# Altium PCB PCB2.PcbDoc
Units mm, origin at the board's own origin, x right, y up, seen from the top; angles counter-clockwise.
Board outline 129 x 69.1 mm, 2 copper layers (Top Layer, Bottom Layer); 35 components, 26 nets, 160 pads, 13 vias.
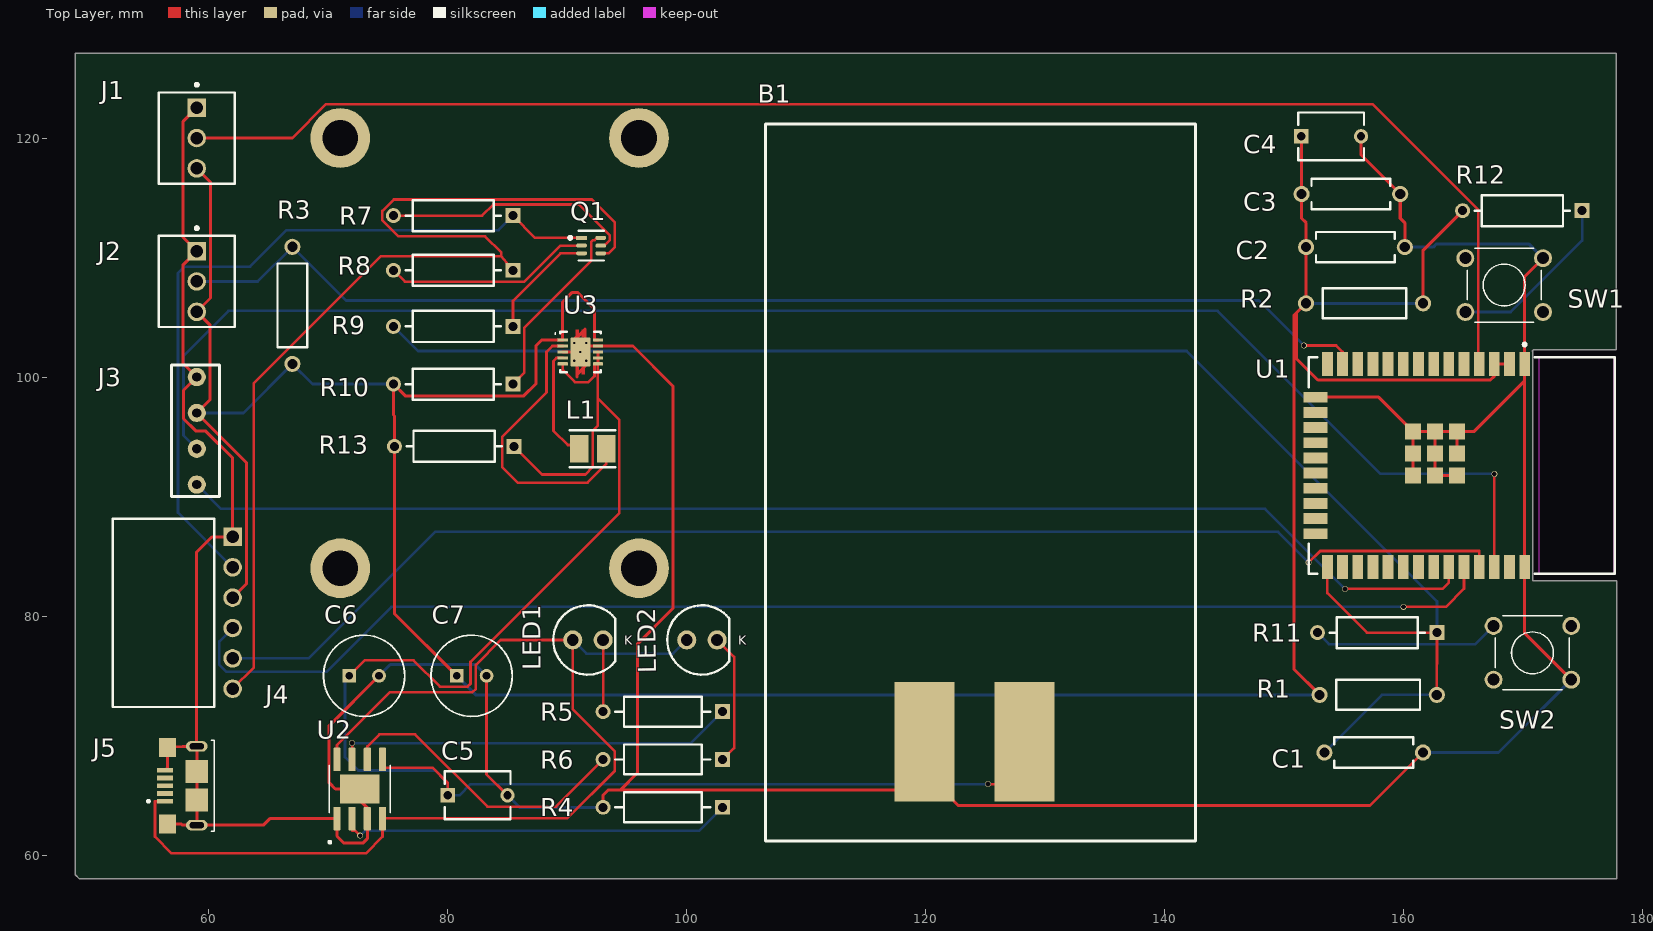
[diagram p0: Top Layer view]
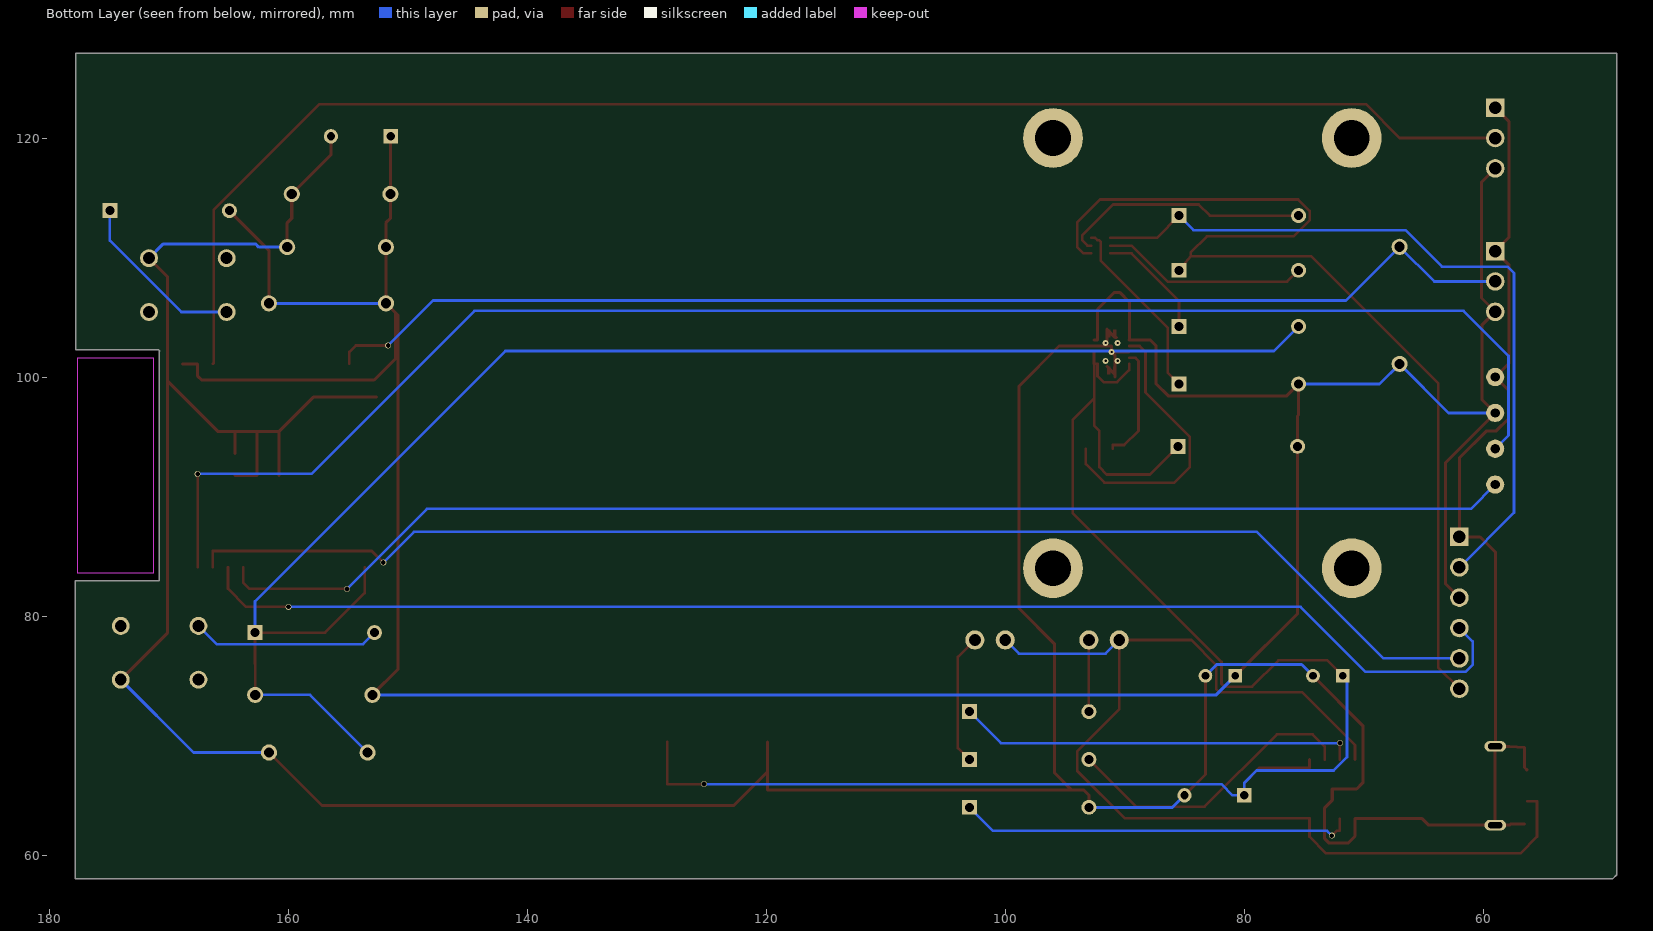
[diagram p1: Bottom Layer view, seen from below]
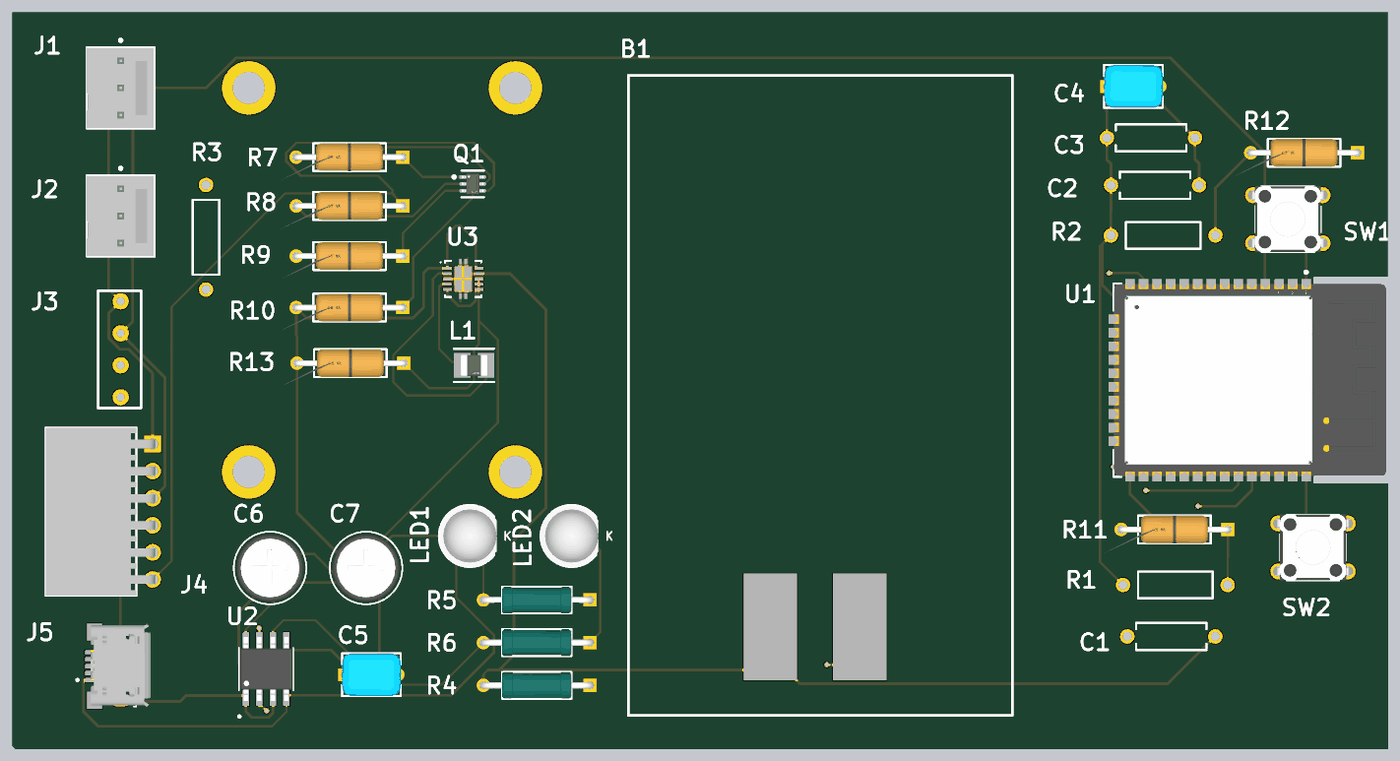
[diagram p2: 3D render of the assembled board from above, using the file's embedded part models]

## Layer stack, top to bottom
Top Solder: solder mask 0.0102, Solder Resist, Dk 3.5
Top Layer: signal copper 0.0356
Dielectric 1: dielectric 0.32, FR-4, Dk 4.8
Bottom Layer: signal copper 0.0356
Bottom Solder: solder mask 0.0102, Solder Resist, Dk 3.5

## Board outline
177.775,127.1 177.775,102.3 170.875,102.3 170.75,102.175 170.8,102.125 170.8,82.95 177.825,82.95 177.825,58 49.175,58 48.825,58.35 48.825,127.1

## Design rules (kind name [scope] priority, off if disabled: settings)
Clearance [All] p1: gap=0.2 ignorepadtopadclearanceinfootprint=TRUE
HoleSize [All] p1: absolutevalues=TRUE maxlimit=3.5 minlimit=0.025 maxpercent=80.000 minpercent=20.000
MinimumSolderMaskSliver [All] p1: minsoldermaskwidth=0.045
PolygonConnect [All] p1: connectstyle=Relief reliefconductorwidth=0.254 reliefentries=4 polygonreliefangle="90 Angle" airgapwidth=0.254
RoutingVias [All] p1: holewidth=0.4 width=0.5 viastyle="Through Hole" minholewidth=0.4 minwidth=0.5 maxholewidth=0.4 maxwidth=0.5
SilkToSilkClearance [All] p1: silktosilkclearance=0.35
SilkToSolderMaskClearance [IsPad] p1: minsilkscreentomaskgap=0.1 clearancetoexposedcopper=TRUE
SolderMaskExpansion [All] p1: expansion=0.102 istentingtop=FALSE
Width WidthPOW [(InNet('3V3') OR InNet('GND'))] p1: maxlimit=0.254 minlimit=0.254 preferedwidth=0.254
Width [All] p2: maxlimit=0.22 minlimit=0.204 preferedwidth=0.22
26 further rules are at their usual default settings.

## Components (designator, comment, footprint, x,y, rotation, side; value= is the part's Value field where it differs from the comment)
B1 "3.7V LiPO battery" Battery_lipo 124.079,69.469 r180 top
C1 "MD015E104MAB" AVX-MD01 157.48,68.58 r180 top
C2 "MD015E104MAB" AVX-MD01 155.956,110.871 r180 top
C3 "MD015E104MAB" AVX-MD01 155.575,115.316 r180 top
C4 "RCER71E226MWM1H03A" FP-RCEWM1-MFG 153.924,120.142 r0 top
C5 "RCER71H106MWK1H03B" FP-RCEWM1-MFG 82.5,65 r0 top
C6 "ECEA1VKN100" FP-RAD-TH-D_6_3_0_5-L_7_1-MFG 73,75 r0 top
C7 "ECEA1VKN100" FP-RAD-TH-D_6_3_0_5-L_7_1-MFG 82,75 r0 top
J1 "TDS" MOLX-22-23-2031_V 59,120 r270 top
J2 "DS18B20" MOLX-22-23-2031_V 59,108 r270 top
J3 "OLED" "female header" 59,96 r0 top
J4 "FT232RL" SMTC-SSW-106-02-X-S-RA 62,86.62 r270 top
J5 "10118193-0001LF" AMPHENOL_10118193-0001LF 59,65.8 r90 top
L1 "LQM2HPN2R2MJ0L" FP-LQM2HPN_J0-IPC_A 92.126,94 r0 top
LED1 "151051BS04000" "Type 5mm" 91.73,78 r0 top
LED2 "151051BS04000" "Type 5mm" 101.27,78 r0 top
Q1 "UMH3NTN" FP-UMT6-IPC_C 92,111 r0 top
R1 "OD103JE" OMTE-RES7X2.5-2 157.861,73.406 r180 top
R2 "OD103JE" OMTE-RES7X2.5-2 156.718,106.172 r180 top
R3 "OD103JE" OMTE-RES7X2.5-2 67,106 r90 top
R4 "MRS25000C9530FCT00" FP-MRS25-MFG 98,64 r180 top
R5 "MRS25000C9530FCT00" FP-MRS25-MFG 98,72 r180 top
R6 "MRS25000C9530FCT00" FP-MRS25-MFG 98,68 r180 top
R7 "ZOR-25-R-52-0R" FP-ZOR-25-R-52-0R-MFG 80.455,113.507 r180 top
R8 "ZOR-25-R-52-0R" FP-ZOR-25-R-52-0R-MFG 80.455,108.935 r180 top
R9 "ZOR-25-R-52-0R" FP-ZOR-25-R-52-0R-MFG 80.455,104.236 r180 top
R10 "ZOR-25-R-52-0R" FP-ZOR-25-R-52-0R-MFG 80.455,99.41 r180 top
R11 "ZOR-25-R-52-0R" FP-ZOR-25-R-52-0R-MFG 157.781,78.613 r180 top
R12 "ZOR-25-R-52-0R" FP-ZOR-25-R-52-0R-MFG 169.926,113.919 r180 top
R13 "ZOR-25-R-52-0R" FP-ZOR-25-R-52-0R-MFG 80.535,94.203 r180 top
SW1 "430156050726" 430156050726 168.402,107.696 r0 top
SW2 "430156050726" 430156050726 170.763,76.926 r0 top
U1 "ESP32-WROOM-32D (4MB)" FP-ESP32-WROOM-32D_4MB-MFG 164.857,92.599 r270 top
U2 "TP4056" SOP127P600X175-9N 72.635,65.525 r90 top
U3 "TPS63000DRCR" DRC0010J_V 91.1,102.1 r0 top

## Footprints (in the part's own frame and the unit in brackets; to place one, negate y for a bottom-side part, rotate by r counter-clockwise, add the part's x,y. Pads: shape width x height; smd on the part's side, far side on the other; paste and mask are expansions set on the pad)
430156050726 [mm] "6*6mm vertical type, THT, height 5.0mm, white actuator, 260gf, Bulk"
  round 1.5 hole 1: 1(-3.25,2.25) 2(-3.25,-2.25) 3(3.25,2.25) 4(3.25,-2.25)
  silkscreen extent -3.1,-3.1 3.1,3.1, body extent -3.95,-3.1 3.95,3.1, height 5.01
AMPHENOL_10118193-0001LF [mm]
  rect 0.4x1.35 smd: 1(-1.3,2.675) 2(-0.65,2.675) 3(0,2.675) 4(0.65,2.675) 5(1.3,2.675)
  rect 1.6x1.4 smd: S1(-3.2,2.45) S2(3.2,2.45)
  rect 1.9x1.9 smd: S3(1.2,0) S4(-1.2,0)
  oval 0.9x1.8 hole 0.5 slot 1.2 at 90 deg: S5(-3.3,0) S6(3.3,0)
  silkscreen extent -3.8,-1.45 3.8,4.15, body extent -3.86,-2.83 4,2.83, height 3.18
AVX-MD01 [mm] "THD, 2-Leads, Body 6.6x2.54mm"
  round 1.35 hole 0.85: 1(-4.127,0) 2(4.127,0)
  silkscreen extent -3.3,-1.27 3.3,1.27, body extent -3.3,-1.27 3.3,1.27, height 4.45
Battery_lipo [mm]
  rect 5x10 smd: +(-4.191,0) -(4.191,0)
  silkscreen extent -18.5,-51.7 17.5,8.3, body extent -19.5,-52.7 18.4,9, height 0.25
DRC0010J_V [mm] "SON, 10-Leads, Body 3x3mm, Pitch 0.5mm, Thermal Pad 2.4x1.65mm, TI Recommended"
  rrect36% 0.85x0.28 smd paste-0.025 mask+0.07: 1(-1.475,1) 2(-1.475,0.5) 3(-1.475,0) 4(-1.475,-0.5) 5(-1.475,-1) 6(1.475,-1) 7(1.475,-0.5) 8(1.475,0) 9(1.475,0.5) 10(1.475,1)
  rrect6% 1.65x2.4 smd paste-0.825 mask+0.07: 11(0,0)
  Top Layer region: -0.39,-1.9 -0.11,-1.9 -0.11,-1.2 -0.39,-1.2
  Top Layer region: 0.39,-1.2 0.11,-1.2 0.11,-1.9 0.39,-1.9
  Top Layer region: 0.39,1.9 0.11,1.9 0.11,1.2 0.39,1.2
  Top Layer region: -0.39,1.2 -0.11,1.2 -0.11,1.9 -0.39,1.9
  silkscreen extent -2.15,-1.7 1.7,1.7, body extent -1.55,-1.55 1.55,1.55, height 1
"female header" [mil]
  round 60 hole 30: 1(0,157.48) 2(0,39.37) 3(0,-78.74) 4(0,-196.85)
  silkscreen extent -83,-236 75,197, body extent -118,-236 118,197, height 118
FP-ESP32-WROOM-32D_4MB-MFG [mm]
  rect 2x0.9 smd paste+0 mask+0: 1(-8.5,5.26) 2(-8.5,3.99) 3(-8.5,2.72) 4(-8.5,1.45) 5(-8.5,0.18) 6(-8.5,-1.09) 7(-8.5,-2.36) 8(-8.5,-3.63) 9(-8.5,-4.9) 10(-8.5,-6.17) 11(-8.5,-7.44) 12(-8.5,-8.71) 13(-8.5,-9.98) 14(-8.5,-11.25) 25(8.5,-11.25) 26(8.5,-9.98) 27(8.5,-8.71) 28(8.5,-7.44) 29(8.5,-6.17) 30(8.5,-4.9) 31(8.5,-3.63) 32(8.5,-2.36) 33(8.5,-1.09) 34(8.5,0.18) 35(8.5,1.45) 36(8.5,2.72) 37(8.5,3.99) 38(8.5,5.26)
  rect 0.9x2 smd paste+0 mask+0: 15(-5.715,-12.25) 16(-4.445,-12.25) 17(-3.175,-12.25) 18(-1.905,-12.25) 19(-0.635,-12.25) 20(0.635,-12.25) 21(1.905,-12.25) 22(3.175,-12.25) 23(4.445,-12.25) 24(5.715,-12.25)
  rect 1.33x1.33 smd paste+0 mask+0: 39(-2.835,-0.405) 39(-2.835,-2.24) 39(-2.835,-4.075) 39(-1,-0.405) 39(-1,-2.24) 39(-1,-4.075) 39(0.835,-0.405) 39(0.835,-2.24) 39(0.835,-4.075)
  Keep-Out Layer region: -9,6.45 9,6.45 9,12.75 -9,12.75
  Keep-Out Layer region: -9,6.45 9,6.45 9,12.75 -9,12.75
  silkscreen extent -10.25,-12.8 9.05,12.8, body extent -9.6,-13.35 9.6,12.9, height 0.25
FP-LQM2HPN_J0-IPC_A [mm]
  rect 1.555x2.306 smd paste+0 mask+0: 1(-1.126,0) 2(1.126,0)
  silkscreen extent -1.9,-1.55 1.9,1.55, body extent -2.4,-1.65 2.4,1.65, height 0.25
FP-MRS25-MFG [mm]
  rect 1.25x1.25 hole 0.75 paste-1000 mask+0: 1(-5,0)
  round 1.25 hole 0.75 paste-1000 mask+0: 2(5,0)
  silkscreen extent -3.98,-1.25 3.97,1.25, body extent -5.72,-1.35 5.72,1.35, height 0.25
FP-RAD-TH-D_6_3_0_5-L_7_1-MFG [mm]
  rect 1.15x1.15 hole 0.65 paste-1000 mask+0: 1(-1.25,0)
  round 1.15 hole 0.65 paste-1000 mask+0: 2(1.25,0)
  silkscreen extent -3.4,-3.4 3.4,3.4, body extent -3.5,-3.5 3.5,3.5, height 0.25
FP-RCEWM1-MFG [mm]
  rect 1.2x1.2 hole 0.7 paste-1000 mask+0: 1(-2.5,0)
  round 1.2 hole 0.7 paste-1000 mask+0: 2(2.5,0)
  silkscreen extent -2.75,-2 2.75,2, body extent -3.2,-2.1 3.2,2.1, height 0.25
FP-UMT6-IPC_C [mm]
  rect 0.909x0.336 smd paste+0 mask+0: 1(-0.802,0.65)
  rrect100% 0.909x0.336 smd paste+0 mask+0: 2(-0.802,0) 3(-0.802,-0.65) 4(0.802,-0.65) 5(0.802,0) 6(0.802,0.65)
  silkscreen extent -1.88,-1.25 1.05,1.25, body extent -1.36,-1.1 1.36,1.1, height 0.25
FP-ZOR-25-R-52-0R-MFG [mm]
  rect 1.25x1.25 hole 0.75 paste-1000 mask+0: 1(-5,0)
  round 1.25 hole 0.75 paste-1000 mask+0: 2(5,0)
  silkscreen extent -3.98,-1.3 3.97,1.3, body extent -5.72,-1.4 5.72,1.4, height 0.25
MOLX-22-23-2031_V [mm] "CONN, 3-Leads, Body 7.62x6.35mm, Pitch 2.54mm"
  rect 1.55x1.55 hole 1.05: 1(-2.54,0)
  round 1.55 hole 1.05: 2(0,0) 3(2.54,0)
  silkscreen extent -4.58,-3.18 3.81,3.17, body extent -3.73,-3.25 3.73,3.1, height 10.67
OMTE-RES7X2.5-2 [mm] "Resistor, Axial; Body 7x2.5mm, Lead Dia. 0.6mm"
  round 1.35 hole 0.85: 1(-4.9,0) 2(4.9,0)
  silkscreen extent -3.5,-1.25 3.5,1.25, body extent -3.5,-1.25 3.5,1.25, height 2.5
SMTC-SSW-106-02-X-S-RA [mm] "SQ Post Socket, 1x6 Pins, Right Angle, 2.54mm Pitch, Female"
  rect 1.55x1.55 hole 1.04: 1(0,0)
  round 1.55 hole 1.04: 2(2.54,0) 3(5.08,0) 4(7.62,0) 5(10.16,0) 6(12.7,0)
  silkscreen extent -1.53,-10.03 14.23,-1.52, body extent -1.52,-10.03 14.22,0.2, height 2.41
SOP127P600X175-9N [mm]
  rrect25% 1.97x0.6 smd: 1(-2.475,1.905) 2(-2.475,0.635) 3(-2.475,-0.635) 4(-2.475,-1.905) 5(2.475,-1.905) 6(2.475,-0.635) 7(2.475,0.635) 8(2.475,1.905)
  rect 2.413x3.302 smd paste-3: 9(0,0)
  silkscreen extent -4.54,-2.55 2,2.6, body extent -3,-2.45 3,2.45, height 1.75
"Type 5mm" [mm] "THT, LED-5mm, 2pin- Body 5.8mm"
  round 1.6 hole 1: 1(1.27,0) 2(-1.27,0)
  silkscreen extent -2.9,-2.9 2.29,2.9, body extent -2.9,-2.9 2.5,2.9, height 11.7

## Part data
B1: library part Battery
C1 C2 C3: library part CMP-2000-06690-1, "Ceramic Capacitor, 0.1 uF, +/- 20%, 50 V, -55 to 125 degC, 2-Pin THD (MD01), Bulk", Capacitance=100nF, Case Size/Dimension=6.6x3.43x2.54mm, Dielectric=Z5U, Manufacturer=AVX, Package Description="2-Pin Through Hole Device, Body 6.6 x 2.54 mm", Package Reference=AVX-MD01, Rated Voltage=50V, Tolerance (%)=±20%, Datasheet URL=http://datasheets.avx.com/dipguard.pdf, Datasheet Version=08/2015, Manufacturer URL=http://www.avx.com/, Mounting Technology=ThroughHole
C4: library part CMP-06035-003622-1, "CAP CER 22UF 25V X7R RADIAL", Capacitance=22uF, Case/Package=Radial, Dielectric=X7R, Max Operating Temperature=125°C, Min Operating Temperature=-55°C, Package Quantity=1500, Ratings=AEC-Q200, Resistor Type=Ceramic, Tolerance=20%, Voltage Rating=25V, Height=7.5mm, Height - Seated (Max)=0.295inch, Lead Diameter=0.5mm, Lead Pitch=0.197inch, Lead/Base Style="Formed Leads", Length=0.217inch, Mount="Through Hole", Packaging="Tape and Reel", Termination=Radial, Voltage Rating (DC)=25V, Width=0.157inch
C5: library part CMP-06035-035073-1, "Cap Ceramic 10uF 50V X7R ±20% Radial 5mm +125°C Automotive Ammo Pack", Capacitance=10uF, Case/Package=Radial, Dielectric=X7R, Max Operating Temperature=125°C, Min Operating Temperature=-55°C, Package Quantity=500, Ratings=AEC-Q200, Resistor Type=Ceramic, Tolerance=20%, Voltage=50V, Depth=7.5mm, Diameter=5.5mm, Height=7.5mm, Height - Seated (Max)=0.295inch, Lead Diameter=0.5mm, Lead Free="Lead Free", Lead Pitch=0.197inch, Lead/Base Style="Formed Leads", Length=5.5mm, Mount="Through Hole", Packaging=Bulk, Termination=Radial, Voltage Rating=50V, Voltage Rating (DC)=50V, Width=4mm
C6 C7: library part CMP-05427-001924-1, "Aluminum Electrolytic Capacitors (Radial Lead Type) 10uF ±20% 35V", Capacitance=10uF, Case/Package=Radial, Max Operating Temperature=85°C, Min Operating Temperature=-40°C, Ripple Current=30mA, Tolerance=20%, Construction=RADIAL, Diameter=6.3mm, Height=7mm, Lead Diameter=0.45mm, Lead Pitch=2.5mm, Life (Hours)=1000Hour, Mount="Through Hole", Packaging=Bulk, Radiation Hardening=No, RoHS Compliant=Yes, Termination=Radial
J1 J2: library part CMP-2000-05242-1, "Male Header, Pitch 2.54 mm, 1 x 3 Position, Height 8.18 mm, Tail Length 3.56 mm, RoHS, Bulk", Current Rating=4A, Manufacturer=Molex, Voltage Rating=250V, Brand=Molex, Contact Gender=Pin(Male), Contact Material=Brass, Contact Plating=Tin, Datasheet URL=https://datasheet.ciiva.com/19472/232274-19472863.pdf, Datasheet Version=Sep-01, Factory Pack Quantity=16000, Housing Material=Nylon, Manufacturer URL=http://www.molex.com/, Mounting Angle=Vertical, Mounting Style=ThroughHole, Number of Positions=3Position, Number of Rows=1Row, Packaging=Bulk, Pitch=2.54mm, Product=Headers, Product Category=Headers&WireHousings, RoHS=Details, Series=6373, Termination Style=ThroughHole, Tradename=KK, Type=Locking
J3: library part "4 PIN FEMALE HEADER"
J4: library part CMP-1023-00363-1, "SSW-106-02-G-S-RA, SQ Post Socket, Through-hole, Right Angle, -55 to 125 degC, 2.54mm Pitch, 6-Pin, Female, RoHS", Manufacturer=Samtec, PartNumber=SSW-106-02-G-S-RA, Temperature Range="-55 to 125 degC", ComponentLink1Description="Manufacturer URL", ComponentLink1URL=http://www.samtec.com, ComponentLink2Description=Datasheet, ComponentLink2URL=http://www.samtec.com/documents/webfiles/pdf/SSW_TH.PDF, ComponentLink3Description="Package Specification", ComponentLink3URL=http://www.samtec.com/documents/webfiles/cpdf/SSW-1XX-XX-XXX-X-XX-XXX-XX-MKT.pdf, DatasheetVersion=F-214, Mounting Technology=Through-hole, Orientation="Right Angle", PackageDescription="Assembly, Socket Strip .016 X .031 Tail", PackageReference=SSW-106-02-X-S-RA, PackageVersion="CA, 6/1987", Pitch="2.54 mm", RoHS=True
L1: library part CMP-06042-016476-1, "Multilayer Type Inductor for Power Lines, 1008 (2520), 2.2μH, 20%, 0.15Ω, 1000mA", Case Code (Imperial)=1008, Case Code (Metric)=2520, Current=140mA, Current Rating=1A, DC Resistance (DCR)=120mR, Inductance=2.2uH, Inductance Tolerance=20%, Max Operating Temperature=125°C, Min Operating Temperature=-55°C, Package Quantity=1, Self Resonant Frequency=40MHz, Test Frequency=1MHz, Case/Package=1008, Core Material=Ferrite, DC Current=1A, Depth=2.2mm, Height=1.1mm, Lead Free="Lead Free", Length=2.5mm, Max DC Current=1A, Military Standard=Not, Mount="Surface Mount", Packaging="Tape and Reel", Radiation Hardening=No, Rated Current-Max=1A, REACH SVHC="No SVHC", Series=LQM2HP_J0, Shielding=Shielded, Termination=SMD/SMT, Tolerance=20%, Width=2mm
LED1 LED2: library part CMP-1488-00009-1, "THT LED round mono-color color lens, WL-TMRW, Blue", Emitting color=Blue, Manufacturer="Wuerth Elektronik", ComponentLink1Description="Manufacturer URL", ComponentLink1URL=http://www.we-online.com, ComponentLink2Description=Datasheet, ComponentLink2URL=http://katalog.we-online.de/pbs/datasheet/7448042001.pdfhttp://katalog.we-online.de/pbs/datasheet/7448042001.pdfhttp://katalog.we-online.de/pbs/datasheet/7448042001.pdfhttp://katalog.we-online.de/pbs/datasheet/151051BS04000.pdf, PackageReference="Type 5mm", PartNumber=151051BS04000
Q1: library part CMP-08979-000010-1, "TRANS 2NPN PREBIAS 0.15W UMT6", Case/Package=SOT-363, Collector Base Voltage (VCBO)=50V, Collector-emitter Voltage-Max=300mV, Continuous Collector Current=100mA, Emitter Base Voltage (VEBO)=5V, Max Operating Temperature=150°C, Max Power Dissipation=150mW, Min Operating Temperature=-55°C, Package Quantity=1, Transition Frequency=250MHz, Collector Emitter Breakdown Voltage=50V, Collector Emitter Voltage (VCEO)=50V, Current Rating=100mA, Element Configuration=Dual, hFE Min=100, Lead Free="Lead Free", Max Breakdown Voltage=50V, Max Collector Current=100mA, Max Output Current=100mA, Mount="Surface Mount", Number of Pins=6, Operating Supply Voltage=50V, Packaging="Tape and Reel", Polarity=NPN, Power Dissipation=150mW, Radiation Hardening=No, REACH SVHC="No SVHC", RoHS Compliant=Yes, Series=-, Voltage Rating (DC)=50V
R1 R2: library part CMP-2000-06865-1, "Little Demon(R) Carbon Composition Molded OD Series, 250 V, 10 KOhm, +/-5%, -70 to 130 degC, 2-Pin THD, RoHS, Bulk", Manufacturer=Ohmite, Operating Temperature=-, Package / Case=Axial, Package Description="2-Pin THD Resistor, Body 7 x 2.5 mm, Lead Dia. 0.6 mm", Package Reference=RES7X2.5, Power (Watts)=0.25W,1/4W, Power Rating=0.25W, Resistance (Ohms)=10k, Standard Package=100, Tolerance=±5%, Catalog Drawings=OD,OF,OASeries, Category=Resistors, Composition=CarbonComposition, Datasheet URL=http://www.ohmite.com/cat/res_od_of_oa.pdf, Datasheet Version=06/2016, EDA / CAD Models=DownloadfromAcceleratedDesigns, Family=ThroughHoleResistors, Features=PulseWithstanding, Height=-, Manufacturer URL=http://www.ohmite.com/, Mounting Technology=ThroughHole, Number of Terminations=2, Online Catalog=OD,OF,OASeries,LittleDemon®, Packaging=Bulk, PartNumber=OD103JE, RoHS Information="LittleDemon\"E\"SeriesMaterialDeclaration", Series=LittleDemon®OD, Size / Dimension="0.098\"Diax0.276\"L(2.50mmx7.00mm)", Supplier Device Package=Axial, Temperature Coefficient=-
R3: library part CMP-2000-06865-1, "Little Demon(R) Carbon Composition Molded OD Series, 250 V, 10 KOhm, +/-5%, -70 to 130 degC, 2-Pin THD, RoHS, Bulk", Manufacturer=Ohmite, Operating Temperature=-, Package / Case=Axial, Package Description="2-Pin THD Resistor, Body 7 x 2.5 mm, Lead Dia. 0.6 mm", Package Reference=RES7X2.5, Power (Watts)=0.25W,1/4W, Power Rating=0.25W, Resistance (Ohms)=4.7k, Standard Package=100, Tolerance=±5%, Catalog Drawings=OD,OF,OASeries, Category=Resistors, Composition=CarbonComposition, Datasheet URL=http://www.ohmite.com/cat/res_od_of_oa.pdf, Datasheet Version=06/2016, EDA / CAD Models=DownloadfromAcceleratedDesigns, Family=ThroughHoleResistors, Features=PulseWithstanding, Height=-, Manufacturer URL=http://www.ohmite.com/, Mounting Technology=ThroughHole, Number of Terminations=2, Online Catalog=OD,OF,OASeries,LittleDemon®, Packaging=Bulk, PartNumber=OD103JE, RoHS Information="LittleDemon\"E\"SeriesMaterialDeclaration", Series=LittleDemon®OD, Size / Dimension="0.098\"Diax0.276\"L(2.50mmx7.00mm)", Supplier Device Package=Axial, Temperature Coefficient=-
R4: library part CMP-02408-000049-1, "RES 953 OHM 0.6W 1% AXIAL", Case/Package=Axial, Max Operating Temperature=155°C, Max Power Dissipation=600mW, Min Operating Temperature=-55°C, Resistance=1.2k, Resistance Tolerance=1%, Resistor Type="Metal Film", Temperature Coefficient=50ppm/°C, Voltage Rating=350V, Construction=Cylindrical, Contact Plating=Tin, Diameter=2.5mm, Lead Free="Lead Free", Lead Length=26mm, Length=6.5mm, Military Standard=Not, Number of Terminations=2, Packaging="Tape and Reel", Power Rating=600mW, Radiation Hardening=No, RoHS Compliant=Yes, Series=MRS25, Technology="THIN FILM", Termination=Axial, Tolerance=1%, Width=2.5mm
R5 R6: library part CMP-02408-000049-1, "RES 953 OHM 0.6W 1% AXIAL", Case/Package=Axial, Max Operating Temperature=155°C, Max Power Dissipation=600mW, Min Operating Temperature=-55°C, Resistance="680 ohm", Resistance Tolerance=1%, Resistor Type="Metal Film", Temperature Coefficient=50ppm/°C, Voltage Rating=350V, Construction=Cylindrical, Contact Plating=Tin, Diameter=2.5mm, Lead Free="Lead Free", Lead Length=26mm, Length=6.5mm, Military Standard=Not, Number of Terminations=2, Packaging="Tape and Reel", Power Rating=600mW, Radiation Hardening=No, RoHS Compliant=Yes, Series=MRS25, Technology="THIN FILM", Termination=Axial, Tolerance=1%, Width=2.5mm
R7 R8 R9 R10 R11 R12 R13: library part CMP-03413-000010-1, "RES 0 OHM JUMPER 1/4W AXIAL", Case/Package=Axial, Max Operating Temperature=155°C, Max Power Dissipation=250mW, Min Operating Temperature=-55°C, Package Quantity=5000, Resistance=0mR, Resistor Type="Carbon Film", Temperature Coefficient=100ppm/°C, Tolerance=5%, Construction=Cylindrical, Lead Free="Lead Free", Length=0.248inch, Military Standard=Not, Number of Terminations=2, Packaging="Tape and Reel", Power Rating=250mW, RoHS Compliant=Yes, Series=ZOR, Termination=Axial
SW1 SW2: library part CMP-1453-00003-1, "WS-TATV THT Tact Switch 6X6 mm", Manufacturer="Wuerth Elektronik", ComponentLink1Description="Manufacturer URL", ComponentLink1URL=http://www.we-online.com, ComponentLink2Description=Datasheet, ComponentLink2URL=http://katalog.we-online.de/em/datasheet/4301x6.pdf, NoPins=04, PackageReference=430156050726, PartNumber=430156050726
U1: library part CMP-194065-000009-1, "RX TXRX MOD WIFI TRACE ANT SMD"
U3: library part CMP-0345-00001-2, "Buck-Boost Voltage Converter with 1.8 to 5.5 V Input and 1.2 to 5.5 V Output, -40 to 85 degC, 10-Pin SON (DRC), Green (RoHS & no Sb/Br)", Dynamic Voltage Scaling=TRUE, Manufacturer="Texas Instruments", Switching Frequency(Max)(kHz)=1500, ComponentLink1Description=Datasheet, ComponentLink1URL=http://www.ti.com/general/docs/lit/getliterature.tsp?genericPartNumber=TPS63000&fileType=pdf, ComponentLink2Description="Package Specification", ComponentLink2URL=http://www.ti.com/litv/pdf/mpds117k, DatasheetVersion=SLVS520B, Eco-Plan="Green (RoHS & no Sb/Br)", Iout(Max)(A)=1.2, Iq(Typ)(mA)=0.04, Mounting Technology="Surface Mount", PackageDescription="10-Pin Plastic Small Outline No-Lead, 3 x 3 x 1 mm Body, 0.5 mm Pitch, Exposed Pad", PackageReference=DRC0010J, PackageVersion="revL, Sep-2011", PartNumber=TPS63000DRCR, Regulated Outputs(#)=1, SubFamily="Buck-Boost Regulator", Synchronous Rectification=TRUE, Topology=Buck-Boost, Vin(Max)(V)=5.5, Vin(Min)(V)=1.8, Vout(Max)(V)=5.5, Vout(Min)(V)=1.2

## Free pads (board coordinates)
  round 5 hole 3: 16(71,84) 17(96,120) 18(96,84) 19(71,120)

## Via types
v1: diameter 0.5, hole 0.4, Top Layer to Bottom Layer, 8 vias
v2: diameter 0.5, hole 0.2, Top Layer to Bottom Layer, 5 vias

## Nets (pads, with @x,y where several pads share a name; then routed paths per layer and width w, separated by ;. In a path a pad name is that pad's centre, name@x,y a point inside that pad or via, vN(x,y) a via of type N, cw(c..) or ccw(c..) an arc to the next point about the centre after c; other vN are vias at no path point)
3.7V: B1.+ C5.1 C6.1 R13.1 U2.5 U3.5 U3.6 U3.7 U3.8 | length 141.6
  Top Layer w0.22: C6.1 73.052,76.302 77.14,76.302 79.35,74.092 81.661,74.092 81.905,74.336 81.905,76.165 94.361,88.621 94.361,96.393 92.558,98.196 ; U2.5 74.54,67.31 78.73,67.31 80,66.04 C5.1 ; R13.1 87.892,91.846 91.516,91.846 92.126,92.456 92.126,95.504 92.558,95.936 92.558,98.196 ; U3.5 89.637,101.1 89.637,100.584 90.653,99.568 91.77,99.568 92.278,100.076 92.278,101.1 U3.6@92.558,101.1 ; U3.8 U3.7 U3.6 U3.6@92.558,101.1 ; v1(125.197,65.938) 128.27,65.938 B1.+ ; 92.558,98.196 U3.6@92.558,101.1
  Bottom Layer w0.22: C6.1 71.399,74.649 71.399,68.199 72.517,67.081 78.959,67.081 80,66.04 C5.1 80.977,65 81.915,65.938 v1(125.197,65.938)
3V3: C2.2 C3.2 C4.1 C7.1 J1.3 J2.3 J3.2 J4.3 R1.2 R2.1 R2.2 R3.1 R10.2 R12.2 R13.2 U1.2 U1.3 U3.1 U3.10 | length 277
  Top Layer w0.254: J1.3 60.147,116.313 60.147,106.607 J2.3 60.122,104.338 60.122,98.122 J3.2 63.144,92.856 63.144,82.684 J4.3 ; C7.1 75.535,80.215 R13.2 75.535,96.749 75.455,96.829 R10.2 76.44,98.425 86.36,98.425 87.401,99.466 87.401,102.643 87.859,103.1 U3.1@89.611,103.1 ; U3.1 U3.1@89.611,103.1 ; U3.10 92.278,103.1 92.278,105.664 90.856,107.086 90.424,107.086 89.611,106.274 U3.1@89.611,103.1 ; C4.1 151.424,117.727 151.447,117.704 C3.2 151.447,113.284 151.828,112.903 C2.2 151.828,108.519 151.818,108.509 R2.2 151.028,105.382 ; R1.2 150.802,75.565 150.802,105.156 151.028,105.382 ; R2.1 161.618,110.611 R12.2 ; U1.2 U1.3 167.577,100.076 167.247,99.746 152.806,99.746 151.028,101.524 151.028,105.382
  Bottom Layer w0.254: J3.2 62.9,97 R3.1 68.69,99.41 R10.2 ; C7.1 82.344,73.406 R1.2 ; R2.2 R2.1
5V: J5.1 LED1.2 LED2.2 U2.4 U2.8 | length 95.2
  Top Layer w0.22: J5.1 55.499,64.5 55.499,61.544 56.896,60.147 73.152,60.147 74.54,61.535 U2.4 74.54,63.068 89.992,63.068 93.98,67.056 93.98,68.682 90.46,72.202 LED1.2 84.424,78 82.345,75.921 82.345,73.914 82.066,73.635 75.15,73.635 70.73,69.215 U2.8
  Bottom Layer w0.22: LED1.2 91.6,76.86 98.86,76.86 LED2.2
DTR: J4.6 Q1.4 R8.1 | length 89.2
  Top Layer w0.22: J4.6 63.779,75.699 63.779,99.492 74.397,110.109 84.48,110.109 ; R8.1 84.48,110.109 ; Q1.4 93.47,110.35 93.986,110.866 93.986,112.948 92.072,114.862 75.488,114.862 74.52,113.894 74.52,113.12 75.87,111.77 83.131,111.77 84.48,110.42 84.48,110.109
EC: J1.2 U1.4 | length 125
  Top Layer w0.22: J1.2 66.998,120 69.828,122.83 157.366,122.83 166.232,113.964 166.232,101.174 U1.4
GND: B1.- C1.1 C2.1 C3.1 C4.2 C5.2 C6.2 C7.2 J1.1 J2.1 J3.1 J4.1 J5.5 J5.S1 J5.S2 J5.S3 J5.S4 J5.S5 J5.S6 R4.2 SW1.3 SW2.4 U1.1 U1.15 U1.38 U1.39 U2.1 U2.3 U2.9 U3.3 U3.9 U3.11 | length 372.7
  Top Layer w0.254: J5.5 56.55,67.325 J5.S2 57.809,69.1 J5.S6@58.979,69.1 ; J5.S1 57.709,62.6 57.809,62.5 J5.S5 ; J1.1 57.861,121.401 57.861,111.679 J2.1 57.861,109.401 57.861,101.139 J3.1 57.887,98.887 57.887,96.52 58.903,95.504 59.715,95.504 62,93.219 J4.1 60.255,86.62 58.979,85.344 J5.S6@58.979,69.1 ; C6.2 70.079,70.829 70.079,66.04 70.594,65.525 U2.9 72.635,64.592 73.27,63.957 U2.3 73.27,61.37 72.898,60.998 71.311,60.998 70.73,61.579 U2.1 65.117,63.05 64.567,62.5 J5.S5 ; C7.2 83.25,66.75 C5.2 ; U3.3 v2(91.1,102.1) ; U3.11@90.71,103.3 90.79,103.3 91.49,104 U3.11@91.49,102.935 ; 90.834,100.005 90.834,100.244 ; U3.11@91.49,100.9 90.834,100.244 ; R4.2 93,65.024 93.406,65.43 94.43,65.43 ; B1.- B1.-@119.888,66.969 ; U1.15 157.902,98.314 U1.39@160.782,95.434 ; C4.2 156.424,118.594 C3.1 159.702,113.284 160.083,112.903 C2.1 ; U1.39@160.782,91.764 160.782,93.599 U1.39@160.782,95.434 ; C1.1 157.17,64.142 122.715,64.142 B1.-@119.888,66.969 ; U1.39@164.452,91.764 162.617,91.764 162.617,93.599 U1.39@162.617,95.434 ; U1.39@164.452,93.599 U1.39@164.452,95.434 ; SW1.3 170.117,108.411 U1.1 170.117,99.689 ; SW2.4 170.117,78.572 U1.38 170.117,99.689 ; J5.S6@58.979,69.1 J5.S6 J5.S3 J5.S4 J5.S5 ; 90.834,100.244 90.834,101.834 v2(91.1,102.1) ; v2(91.1,102.1) 91.1,102.591 95.504,102.591 98.857,99.238 98.857,80.645 95.86,77.648 95.86,66.86 94.43,65.43 ; 94.43,65.43 119.888,65.43 B1.-@119.888,66.969 ; U1.39@160.782,95.434 U1.39@162.617,95.434 ; U1.39@162.617,95.434 U1.39@164.452,95.434 ; U1.39@164.452,95.434 165.862,95.434 170.117,99.689
  Bottom Layer w0.254: C6.2 75.196,75.946 82.304,75.946 C7.2 ; C5.2 86,64 R4.2 ; C2.1 162.458,110.871 162.738,111.15 170.448,111.15 SW1.3 ; C1.1 167.917,68.58 SW2.4
  other v2: 90.6,101.35 91.6,101.35 90.6,102.85 91.6,102.85
IO0: C1.2 R1.1 R9.2 R11.1 U1.25 | length 128.8
  Top Layer w0.22: U1.25 153.607,81.927 156.921,78.613 R11.1 162.781,76.017 162.761,75.997 R1.1
  Bottom Layer w0.22: R9.2 77.507,102.184 141.834,102.184 162.781,81.237 R11.1 ; C1.2 158.178,73.406 R1.1
NetL1_1: L1.1 U3.4 | length 9.7
  Top Layer w0.22: U3.4 89.103,101.6 88.849,101.346 88.849,95.504 90.043,94.31 91,94.31 L1.1
NetL1_2: L1.2 U3.2 | length 23.9
  Top Layer w0.22: U3.2 88.757,102.6 88.265,102.108 88.265,98.704 84.557,94.996 84.557,92.456 85.852,91.161 91.702,91.161 93.251,92.71 L1.2
NetLED1_1: LED1.1 R5.2 | length 6
  Top Layer w0.22: R5.2 LED1.1
NetLED2_1: LED2.1 R6.1 | length 11
  Top Layer w0.22: LED2.1 103.962,76.578 103.962,68.962 R6.1
NetQ1_2: Q1.2 R8.2 | length 17.4
  Top Layer w0.22: R8.2 76.415,107.975 86.411,107.975 89.435,111 Q1.2
NetQ1_3: Q1.3 R9.1 | length 9.5
  Top Layer w0.22: R9.1 85.455,106.385 89.42,110.35 Q1.3
NetQ1_5: Q1.5 R7.2 | length 20.9
  Top Layer w0.22: R7.2 82.885,113.507 83.82,114.442 90.972,114.442 93.566,111.848 93.566,111.452 93.114,111 Q1.5
NetQ1_6: Q1.6 R10.1 | length 15.6
  Top Layer w0.22: R10.1 86.411,100.366 86.411,104.14 91.999,109.728 91.999,111.307 92.154,111.462 92.296,111.462 92.484,111.65 Q1.6
NetR4_1: R4.1 U2.2 | length 33.2
  Top Layer w0.22: U2.2 72,62.027 72.263,62.027 v1(72.669,61.62)
  Bottom Layer w0.22: v1(72.669,61.62) 73.076,62.027 101.027,62.027 R4.1
NetR5_1: R5.1 U2.7 | length 33.5
  Top Layer w0.22: v1(71.984,69.367) 72,69.351 U2.7
  Bottom Layer w0.22: v1(71.984,69.367) 100.367,69.367 R5.1
NetR6_2: R6.2 U2.6 | length 25.4
  Top Layer w0.22: U2.6 73.27,69.088 74.286,70.104 77.267,70.104 83.312,64.059 89.059,64.059 R6.2
NetR11_2: R11.2 SW2.1 | length 15.8
  Bottom Layer w0.22: R11.2 153.746,77.648 165.985,77.648 SW2.1
NetR12_1: R12.1 SW1.2 | length 14.7
  Bottom Layer w0.22: SW1.2 168.946,105.446 174.926,111.426 R12.1
RTS: J4.2 Q1.1 R7.1 | length 63
  Top Layer w0.22: R7.1 87.312,111.65 Q1.1
  Bottom Layer w0.22: J4.2 57.429,88.651 57.429,108.712 57.963,109.245 63.449,109.245 66.497,112.293 84.241,112.293 R7.1
RX: J4.5 U1.35 | length 111.5
  Top Layer w0.22: v1(152.044,84.48) 153.01,85.446 166.307,85.446 U1.35
  Bottom Layer w0.22: J4.5 68.357,76.46 78.943,87.046 149.479,87.046 v1(152.044,84.48)
SCL: J3.3 U1.36 | length 132.9
  Top Layer w0.22: U1.36 v1(167.577,91.897)
  Bottom Layer w0.22: J3.3 57.887,95.113 57.887,101.778 61.646,105.537 144.424,105.537 158.064,91.897 v1(167.577,91.897)
SDA: J3.4 U1.33 | length 109.9
  Top Layer w0.22: v1(155.092,82.271) 163.234,82.271 163.767,82.804 U1.33
  Bottom Layer w0.22: J3.4 61.024,88.976 148.387,88.976 v1(155.092,82.271)
temperature: J2.2 R3.2 U1.13 | length 101.7
  Top Layer w0.22: v1(151.638,102.641) 154.344,102.641 154.877,102.108 U1.13
  Bottom Layer w0.22: J2.2 64.1,108 R3.2 71.499,106.401 147.879,106.401 v1(151.638,102.641)
TX: J4.4 U1.34 | length 112.6
  Top Layer w0.22: v1(159.969,80.772) 163.513,80.772 165.037,82.296 U1.34
  Bottom Layer w0.22: J4.4 60.884,77.884 60.884,75.921 61.468,75.336 69.85,75.336 75.286,80.772 v1(159.969,80.772)
pads on no net: J5.2 J5.3 J5.4 SW1.1 SW1.4 SW2.2 SW2.3 U1.5 U1.6 U1.7 U1.8 U1.9 U1.10 U1.11 U1.12 U1.14 U1.16 U1.17 U1.18 U1.19 U1.20 U1.21 U1.22 U1.23 U1.24 U1.26 U1.27 U1.28 U1.29 U1.30 U1.31 U1.32 U1.37

## Text inside footprints (layer, text, board x,y; h text height)
J5: Mechanical 13 "PCB END" at 60.2,70.65 h0.41 r90
LED1: Top Overlay "K" at 94.778,77.619 h0.76; Mechanical 15 "K" at 94.778,77.619 h0.76
LED2: Top Overlay "K" at 104.318,77.619 h0.76; Mechanical 15 "K" at 104.318,77.619 h0.76